# Altium PCB MCU103A.PcbDoc (part 2 of 6)
Units mm, origin at the board's own origin, x right, y up, seen from the top; angles counter-clockwise.
Board outline 58.42 x 139.7 mm, 4 copper layers (Top Signal, GND, PWR, Bottom Signal), stack 1.565 mm thick; 256 components, 210 nets, 1058 pads, 772 vias.
Unrouted connection lines stored in the file: 237.
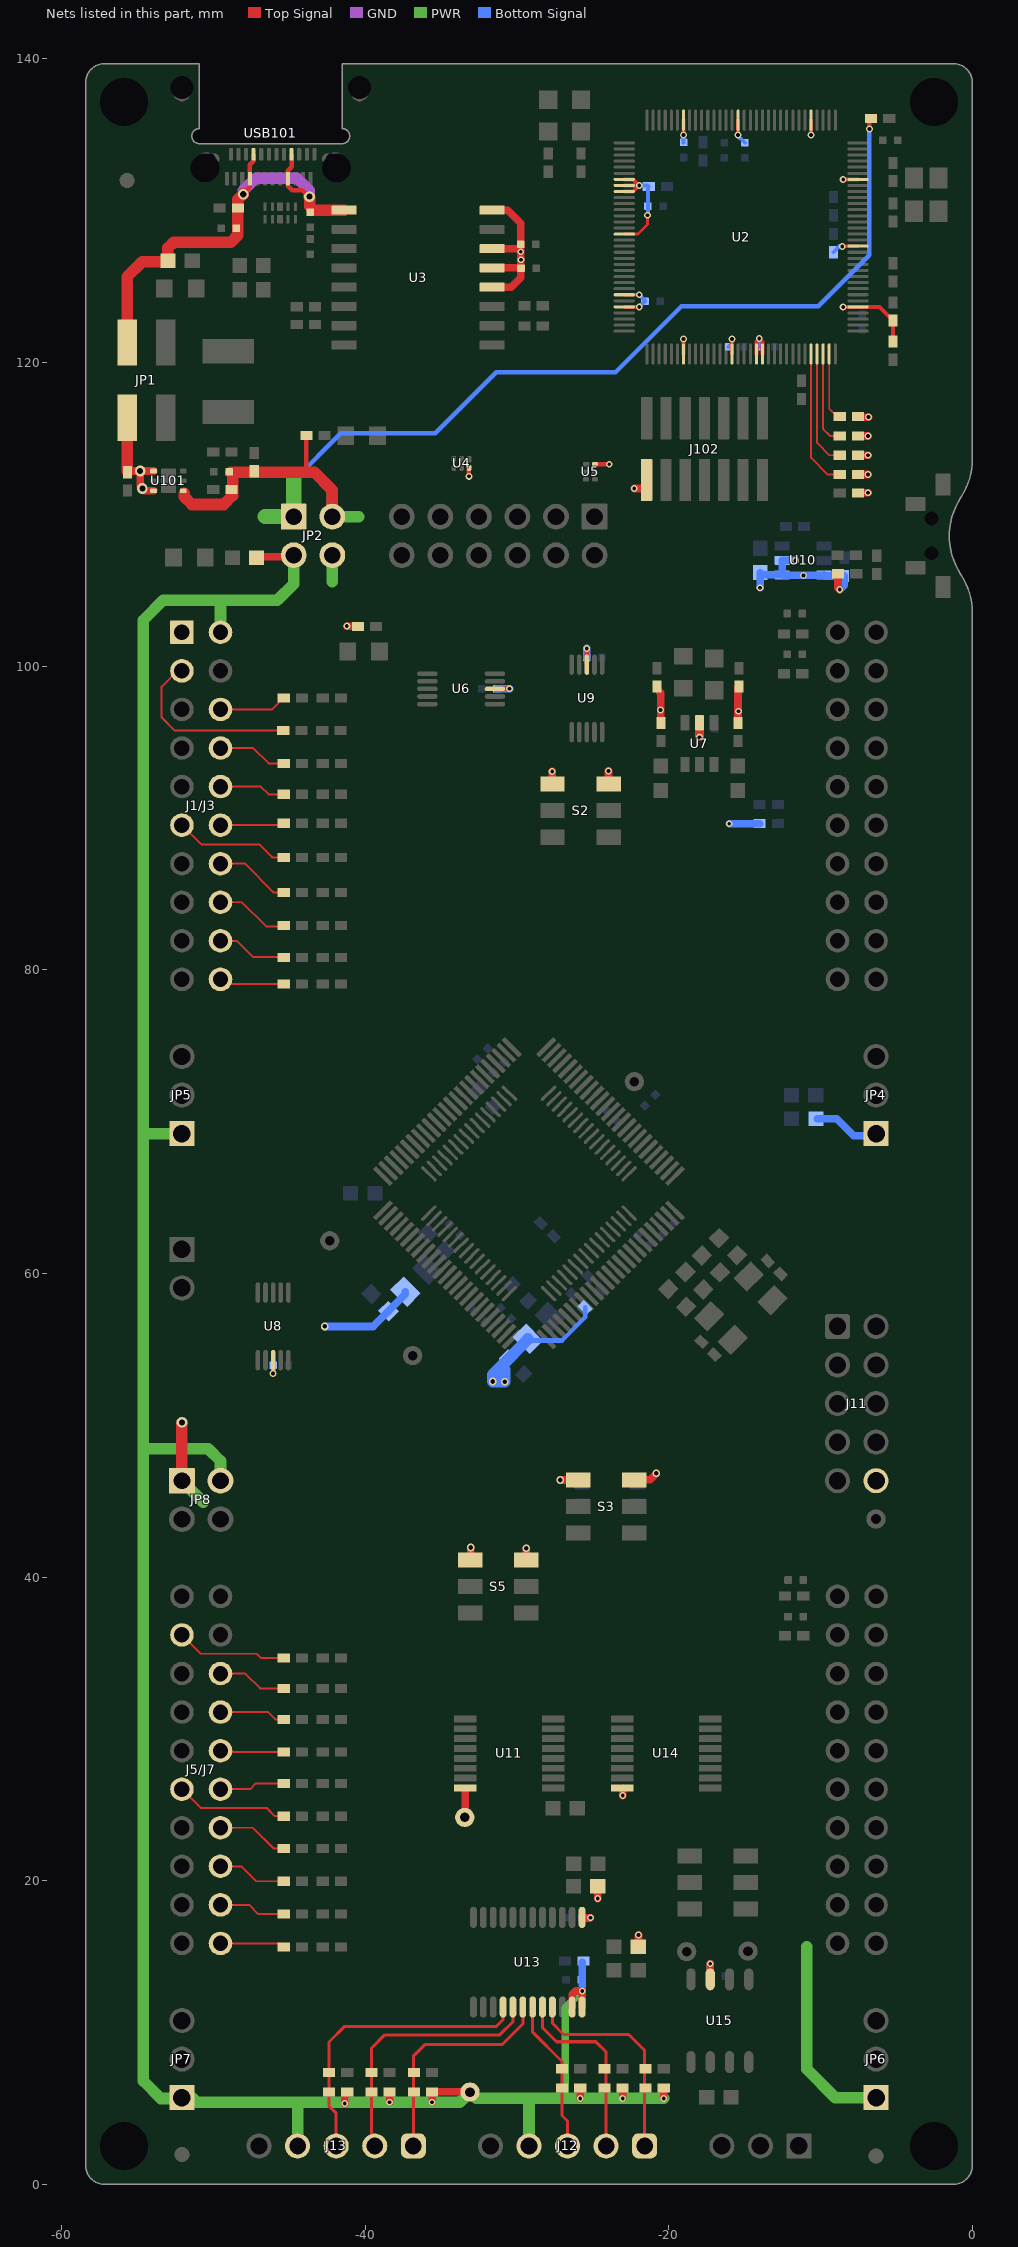
[diagram p4: the nets of this part, all layers, seen from the top]

## Part data
C1 C2 C10 C11 C12 C13 C14 C20 C21 C22 C23 C43 C44 C45 C46 C54 C55 C60 C64 C65 C66 C74 C81 C82 C83 C84 C105 C106: library part CMP-0090362-1, "0.1µF ±10% 10V Ceramic Capacitor X7R 0402 (1005 Metric)", Digikey Part Number=732-7513-1-ND, Manufacturer="Wurth Electronics", Mouser Part Number=710-885012205018, Operating Temperature Range="-55°C to +125°C", TempCo=15%, Temperature Characteristic=X7R, Tolerance_%=10%, ValueDisplayed=100000pF, AEC Qualified=No, Cap_F=100nF, ComponentLink1Description=Datasheet, ComponentLink1URL=https://www.we-online.com/catalog/datasheet/885012205018.pdf, datasheet=https://www.we-online.com/catalog/datasheet/885012205018.pdf, Datasheet Path=datasheets/Cap-885012205018.pdf, Digikey Description="CAP CER 0.1UF 10V X7R 0402", helpURL=https://upverter.com/upn/revision/1acbe355db19639d/, Lead Free=Yes, PackageReference=0402, Part Number=885012205018, PartNumber=885012205018, RoHS=TRUE, SizeZ_mm=0.55mm, Supplier 1=Digikey, Supplier 2=Mouser, Supplier Part Number 1=732-7513-1-ND, Supplier Part Number 2=710-885012205018, VDC_V=10V
C6 C17: library part CMP-0006629-2, "CAP, CERM, 0.1 uF, 10 V, +/- 10%, X7R, 0402", Cap_Case=0402, Manufacturer=MuRata, Supplier Part Number 1=GRM155R71A104KA01D-ND, TempCo=X7R, Tolerance_%=10%, Value1=Unknown, Value2=10V, ValueDisplayed=0.1uF, AEC Category=Q200, AEC Qualified=?, Cap_F=100nF, ComponentLink1Description="Datasheet link", ComponentLink1URL=http://search.murata.co.jp/Ceramy/PnsearchViewAction.do?HnOFG=ON&HnNFG=ON&SEL_CNT=50&sLang=en&sKey=GRM155R71A104KA01D&x=9&y=9&search=startwith, CompType=Capacitor, LatestRevisionDate=2017-03-09, MountType=SMT, PackageReference=0402, PartNumber=GRM155R71A104KA01D, Polarized=N, Published=2008-06-19, Publisher="Texas Instruments", RoHS=Y, SizeArea_mm2=0.5, SizeAreaWB_mm2=3, SizeX_mm=1, SizeY_mm=0.5, SizeZ_mm=0.6, Supplier 1=Digi-Key, Supplier 2=Newark, Supplier 3=Mouser, Supplier Part Number 2=14T3278, Supplier Part Number 3=81-GRM155R71A104KA1D, TaMax_C=125°C, TaMin_C=-55°C, Technology=Ceramic, U/M=EA, VDC_V=10V
C7 C8: library part CMP-0006658-2, "CAP, CERM, 0.01 uF, 25 V, +/- 10%, X7R, 0402", Cap_Case=0402, Manufacturer=MuRata, Supplier Part Number 1=490-1312-1-ND, TempCo=X7R, Tolerance_%=10%, Value1=Unknown, Value2=25V, ValueDisplayed=0.01uF, AEC Category=Q200, AEC Qualified=?, Cap_F=10nF, ComponentLink1Description="Datasheet link", ComponentLink1URL=http://search.murata.co.jp/Ceramy/PnsearchViewAction.do?HnOFG=ON&HnNFG=ON&SEL_CNT=50&sLang=en&sKey=GRM155R71E103KA01D&x=9&y=9&search=startwith, CompType=Capacitor, LatestRevisionDate=2017-03-09, MountType=SMT, PackageReference=0402, PartNumber=GRM155R71E103KA01D, Polarized=N, Published=2008-06-19, Publisher="Texas Instruments", RoHS=Y, SizeArea_mm2=0.5, SizeAreaWB_mm2=3, SizeX_mm=1, SizeY_mm=0.5, SizeZ_mm=0.6, Supplier 1=Digi-Key, Supplier 2=Mouser, Supplier 3=Farnell, Supplier Part Number 2=81-GRM36X103K25, Supplier Part Number 3=8819734, TaMax_C=125°C, TaMin_C=-55°C, Technology=Ceramic, U/M=EA, VDC_V=25V
C9 C18 C19: library part CMP-0092309-1, "Cap Ceramic 10uF 10V X5R 10% SMD 0603 85C Paper T/R", Digikey Part Number=311-1782-1-ND, Manufacturer=YAGEO, Mouser Part Number=603-CC603KRX5R6BB106, Octopart Part Number=1f0ad7d7c223c0cd, Operating Temperature Range="-55°C to +85°C", TempCo=15%, Temperature Characteristic=X5R, Tolerance_%=10%, ValueDisplayed=10uF, AEC Qualified=No, Cap_F=10µF, Category 4C11811B7D3097D6="Single Components", Category 85Ce48C4B2B95E09=Uncategorized, Category 7542B8484461Ae85="Passive Components", Category F8883582C9A8234F=Capacitors, ComponentLink1Description=Datasheet, ComponentLink1URL=https://www.yageo.com/upload/media/product/productsearch/datasheet/mlcc/UPY-GPHC_X5R_4V-to-50V_26.pdf, datasheet=https://www.yageo.com/upload/media/product/productsearch/datasheet/mlcc/UPY-GPHC_X5R_4V-to-50V_26.pdf, Datasheet Path=datasheets/Cap-CC0603KRX5R6BB106.pdf, Digikey Description="CAP CER 10UF 10V X5R 0603", helpURL=https://upverter.com/upn/revision/d12d152cf6e6e3e0/, Lead Free=Yes, Mouser Description="Multilayer Ceramic Capacitors MLCC - SMD/SMT 10M pF 10% 10 Volts", PackageReference=0603, Part Number=CC0603KRX5R6BB106, PartNumber=CC0603KRX5R6BB106, RoHS=TRUE, SizeZ_mm=1mm, Supplier 1=Digikey, Supplier 2=Mouser, Supplier Part Number 1=311-1782-1-ND, Supplier Part Number 2=603-CC603KRX5R6BB106, VDC_V=10V
C15 C16 C24: library part CMP-0007323-5, "CAP, CERM, 2.2 uF, 10 V, +/- 10%, X5R, 0603", Cap_Case=0603, Manufacturer=MuRata, Supplier Part Number 1=490-1545-1-ND, TempCo=X5R, Tolerance_%=10%, Value1=Unknown, Value2=10V, ValueDisplayed=2.2uF, AEC Category=Q200, AEC Qualified=?, Cap_F=2.2µF, ComponentLink1Description="Datasheet link", ComponentLink1URL=http://search.murata.co.jp/Ceramy/PnsearchViewAction.do?HnOFG=ON&HnNFG=ON&SEL_CNT=50&sLang=en&sKey=GRM188R61A225KE34D&x=9&y=9&search=startwith, CompType=Capacitor, LatestRevisionDate=2017-03-09, MountType=SMT, PackageReference=0603, PartNumber=GRM188R61A225KE34D, Polarized=N, Published=2008-06-19, Publisher="Texas Instruments", RoHS=Y, SizeArea_mm2=1.28, SizeAreaWB_mm2=4.68, SizeX_mm=1.6, SizeY_mm=0.8, SizeZ_mm=1, Supplier 1=Digi-Key, Supplier 2=Mouser, Supplier 3=Farnell, Supplier Part Number 2=81-GRM188R61A225KE34, Supplier Part Number 3=1828799, TaMax_C=85°C, TaMin_C=-55°C, Technology=Ceramic, U/M=EA, VDC_V=10V
C25 C26 C27 C28 C29 C30 C31 C32 C33 C34 C35 C36 C37 C38 C39 C40 C75 C76 C77 C78: library part CMP-0006218-2, "CAP, CERM, 220 pF, 50 V, +/- 5%, C0G/NP0, 0402", Cap_Case=0402, Manufacturer="Wurth Elektronik", Supplier Part Number 1=732-7477-1-ND, TempCo=C0G/NP0, Tolerance_%=5%, Value1=Unknown, Value2=50V, ValueDisplayed=220pF, AEC Category=Q200, AEC Grade=N/A, AEC Qualified=N, Cap_F=220pF, ComponentLink1Description="Datasheet link", ComponentLink1URL=http://katalog.we-online.de/pbs/datasheet/885012005063.pdf, CompType=Capacitor, LatestRevisionDate=2017-03-09, MountType=SMT, PackageReference=0402, PartNumber=885012005063, Polarized=N, Published=2008-06-19, Publisher="Texas Instruments", RoHS=Y, SizeArea_mm2=0.5, SizeAreaWB_mm2=3, SizeX_mm=1, SizeY_mm=0.5, SizeZ_mm=0.6, Supplier 1=Digi-Key, Supplier 2=Mouser, Supplier Part Number 2=710-885012005063, TaMax_C=125°C, TaMin_C=-55°C, Technology=Ceramic, U/M=EA, VDC_V=50V
C41 C42: library part CMP-0006239-2, "CAP, CERM, 12 pF, 25 V, +/- 5%, C0G/NP0, AEC-Q200 Grade 1, 0402", Cap_Case=0402, Manufacturer=Kemet, Supplier Part Number 1=399-6829-1-ND, TempCo=C0G/NP0, Tolerance_%=5%, Value1=Unknown, Value2=25V, ValueDisplayed=12pF, AEC Category=Q200, AEC Grade=1, AEC Qualified=Y, Cap_F=12pF, ComponentLink1Description="Datasheet link", ComponentLink1URL=http://www.kemet.com/Lists/ProductCatalog/Attachments/420/KEM_C1022_C0G_AUTO_SMD.pdf, CompType=Capacitor, LatestRevisionDate=2017-03-09, MountType=SMT, PackageReference=0402, PartNumber=C0402C120J3GACAUTO, Polarized=N, Published=2008-06-19, Publisher="Texas Instruments", RoHS=Y, SizeArea_mm2=0.5, SizeAreaWB_mm2=3, SizeX_mm=1, SizeY_mm=0.5, SizeZ_mm=0.6, Supplier 1=Digi-Key, Supplier 2=Newark, Supplier 3=Mouser, Supplier Part Number 2=86T2558, Supplier Part Number 3=80-C0402C120J3GAUTO, TaMax_C=125°C, TaMin_C=-55°C, Technology=Ceramic, U/M=EA, VDC_V=25V
C50 C51 C52 C53 C58 C102: library part CMP-0090363-1, "10000pF ±10% 25V Ceramic Capacitor X7R 0402 (1005 Metric)", Digikey Part Number=732-7545-1-ND, Manufacturer="Wurth Electronics", Mouser Part Number=710-885012205050, Operating Temperature Range="-55°C to +125°C", TempCo=15%, Temperature Characteristic=X7R, Tolerance_%=10%, ValueDisplayed=10000pF, AEC Qualified=No, Cap_F=10nF, ComponentLink1Description=Datasheet, ComponentLink1URL=https://www.we-online.com/catalog/datasheet/885012205050.pdf, datasheet=https://www.we-online.com/catalog/datasheet/885012205050.pdf, Datasheet Path=datasheets/Cap-885012205050.pdf, Digikey Description="CAP CER 10000PF 25V X7R 0402", helpURL=https://upverter.com/upn/revision/f9df62cb48b9b255/, Lead Free=Yes, PackageReference=0402, Part Number=885012205050, PartNumber=885012205050, RoHS=TRUE, SizeZ_mm=0.55mm, Supplier 1=Digikey, Supplier 2=Mouser, Supplier Part Number 1=732-7545-1-ND, Supplier Part Number 2=710-885012205050, VDC_V=25V
C56 C57 C59 C61 C100 C103: library part CMP-0064924-2, "CAP, CERM, 1 uF, 10 V,+/- 20%, X5R, 0402", Cap_Case=0402, Manufacturer="Wurth Elektronik", Supplier Part Number 1=732-7489-1-ND, TempCo=X5R, Tolerance_%=20%, Value1=Unknown, Value2=10V, ValueDisplayed=1uF, AEC Category=Q200, AEC Grade=N/A, AEC Qualified=N, Cap_F=1µF, ComponentLink1Description="Datasheet link", ComponentLink1URL=http://katalog.we-online.de/pbs/datasheet/885012105012.pdf, CompType=Capacitor, LatestRevisionDate=2017-06-05, MountType=SMT, PackageReference=0402, PartNumber=885012105012, Polarized=N, Published=2008-06-19, Publisher="Texas Instruments", RoHS=Y, SizeArea_mm2=0.5, SizeAreaWB_mm2=3, SizeX_mm=1, SizeY_mm=0.5, SizeZ_mm=0.6, Supplier 1=Digi-Key, Supplier 2=Newark, Supplier 3=Mouser, Supplier Part Number 2=75Y5997, Supplier Part Number 3=710-885012105012, TaMax_C=85°C, TaMin_C=-55°C, Technology=Ceramic, U/M=EA, VDC_V=10V
C62 C63: library part CMP-0006415-2, "CAP, CERM, 12 pF, 50 V, +/- 5%, C0G/NP0, 0402", Cap_Case=0402, Manufacturer=MuRata, Supplier Part Number 1=14T3292, TempCo=C0G/NP0, Tolerance_%=5%, Value1=Unknown, Value2=50V, ValueDisplayed=12pF, AEC Category=Q200, AEC Qualified=?, Cap_F=12pF, ComponentLink1Description="Datasheet link", ComponentLink1URL=http://search.murata.co.jp/Ceramy/PnsearchViewAction.do?HnOFG=ON&HnNFG=ON&SEL_CNT=50&sLang=en&sKey=GRM1555C1H120JA01D&x=9&y=9&search=startwith, CompType=Capacitor, LatestRevisionDate=2017-03-09, MountType=SMT, PackageReference=0402, PartNumber=GRM1555C1H120JA01D, Polarized=N, Published=2008-06-19, Publisher="Texas Instruments", RoHS=Y, SizeArea_mm2=0.5, SizeAreaWB_mm2=3, SizeX_mm=1, SizeY_mm=0.5, SizeZ_mm=0.6, Supplier 1=Newark, Supplier 2=Mouser, Supplier 3=Farnell, Supplier Part Number 2=81-GRM1555C1H120JA1D, Supplier Part Number 3=1828875, TaMax_C=125°C, TaMin_C=-55°C, Technology=Ceramic, U/M=EA, VDC_V=50V
C67 C68 C69 C70 C71 C72 C73: library part CMP-0006231-2, "CAP, CERM, 1000 pF, 50 V, +/- 10%, X7R, 0402", Cap_Case=0402, Manufacturer="Wurth Elektronik", Supplier Part Number 1=732-7556-1-ND, TempCo=X7R, Tolerance_%=10%, Value1=Unknown, Value2=50V, ValueDisplayed=1000pF, AEC Category=Q200, AEC Grade=N/A, AEC Qualified=N, Cap_F=1nF, ComponentLink1Description="Datasheet link", ComponentLink1URL=http://katalog.we-online.de/pbs/datasheet/885012205061.pdf, CompType=Capacitor, LatestRevisionDate=2017-03-09, MountType=SMT, PackageReference=0402, PartNumber=885012205061, Polarized=N, Published=2008-06-19, Publisher="Texas Instruments", RoHS=Y, SizeArea_mm2=0.5, SizeAreaWB_mm2=3, SizeX_mm=1, SizeY_mm=0.5, SizeZ_mm=0.6, Supplier 1=Digi-Key, Supplier 2=Mouser, Supplier Part Number 2=710-885012205061, TaMax_C=125°C, TaMin_C=-55°C, Technology=Ceramic, U/M=EA, VDC_V=50V
C101: library part CMP-0092424-1, "Cap Cer 3300pF 50V X7R 0402", Digikey Part Number=732-7559-1-ND, Manufacturer="Wurth Electronics", Mouser Part Number=710-885012205064, Operating Temperature Range="-55°C to +125°C", TempCo=15%, Temperature Characteristic=X7R, Tolerance_%=10%, ValueDisplayed=3.3nF, AEC Qualified=No, Cap_F=3.3nF, ComponentLink1Description=Datasheet, ComponentLink1URL=https://www.we-online.com/catalog/datasheet/885012205064.pdf, datasheet=https://www.we-online.com/catalog/datasheet/885012205064.pdf, Datasheet Path=datasheets/Cap-885012205064.pdf, Digikey Description="CAP CER 3300PF 50V X7R 0402", helpURL=https://upverter.com/upn/revision/78c7421d1fb19545/, Lead Free=Yes, PackageReference=0402, Part Number=885012205064, PartNumber=885012205064, RoHS=TRUE, SizeZ_mm=0.55mm, Supplier 1=Digikey, Supplier 2=Mouser, Supplier Part Number 1=732-7559-1-ND, Supplier Part Number 2=710-885012205064, VDC_V=50V
C104: library part CMP-0009297-2, "CAP, CERM, 0.01 uF, 1500 V, +/- 10%, X7R, 1812", Cap_Case=1812, Manufacturer=AVX, Supplier Part Number 1=478-4735-1-ND, TempCo=X7R, Tolerance_%=10%, Value1="0.05 ohm", Value2=1500V, ValueDisplayed=0.01uF, AEC Category=Q200, AEC Grade=N/A, AEC Qualified=N, Cap_F=10nF, ComponentLink1Description="Datasheet link", ComponentLink1URL=http://datasheets.avx.com/AVX-HV_MLCC.pdf, CompType=Capacitor, ESR_ohm=0.05, LatestRevisionDate=2017-03-09, MountType=SMT, PackageReference=1812, PartNumber=1812SC103KAT1A, Polarized=N, Published=2008-06-19, Publisher="Texas Instruments", RoHS=Y, SizeArea_mm2=14.4, SizeAreaWB_mm2=23.1, SizeX_mm=4.5, SizeY_mm=3.2, SizeZ_mm=1.35, Supplier 1=Digi-Key, Supplier 2=Newark, Supplier 3=Mouser, Supplier Part Number 2=96M1562, Supplier Part Number 3=581-1812SC103KAT1A, TaMax_C=125°C, TaMin_C=-55°C, Technology=Ceramic, U/M=EA, VDC_V=1.5kV
"CE Logo1": library part CMP-0074844-1, LatestRevisionDate=2017-07-06, Lib Reference="CE Mark", PartNumber="CE Mark", Published=2009-03-03, Publisher="Texas Instruments", SymbolCreator=a0412235
FID1 FID2 FID3 FID4 FID5 FID6: library part CMP-0077181-1, "Fiducial mark.  There is nothing to buy or mount.", Manufacturer=N/A, ClassName=FiducialMark, CompType=Fiducial, MountType=N/A, PackageReference=N/A, PartNumber=N/A
J1/J3: library part CMP-0003837-4, "Receptacle, 2.54mm, 10x2, Tin, TH", Alternate Manufacturer="Major League Electronics", Alternate PartNumber=CRD-081413-A-G, Manufacturer=Samtec, Supplier Part Number 1=SAM1204-10-ND, ComponentLink1Description="Datasheet Link", ComponentLink1URL=https://www.samtec.com/ftppub/cpdf/SSQ-1XX-XX-XXX-X-XX-XXX-XX-X-MKT.pdf, CompType=Receptacle, Green_EU RoHS=Passed, Green_EU RoHS-2=Passed, Green_Lifecycle=Active, Green_REACh=Incomplete, MountType=TH, Note="Booster Pack 40 pin J1 and J3", PackageReference="10x2 Receptacle", PartNumber=SSQ-110-03-T-D, RoHS=Y, Supplier 1=Digi-Key, Supplier 2=Newark, Supplier Part Number 2=11P8392
J4/J2: library part CMP-0078266-4, "Receptacle, 2.54mm, 10x2, Tin, TH", Alternate Manufacturer="Major League Electronics", Alternate PartNumber=CRD-081413-A-G, Manufacturer=Samtec, Supplier Part Number 1=SAM1204-10-ND, ComponentLink1Description="Datasheet Link", ComponentLink1URL=https://www.samtec.com/ftppub/cpdf/SSQ-1XX-XX-XXX-X-XX-XXX-XX-X-MKT.pdf, CompType=Receptacle, Green_EU RoHS=Passed, Green_EU RoHS-2=Passed, Green_Lifecycle=Active, Green_REACh=Incomplete, MountType=TH, Note="Booster Pack 40 pin J2 and J4", PackageReference="10x2 Receptacle", PartNumber=SSQ-110-03-T-D, RoHS=Y, Supplier 1=Digi-Key, Supplier 2=Newark, Supplier Part Number 2=11P8392
J5/J7: library part CMP-0081070-3, "Receptacle, 2.54mm, 10x2, Tin, TH", Alternate Manufacturer="Major League Electronics", Alternate PartNumber=CRD-081413-A-G, Manufacturer=Samtec, Supplier Part Number 1=SAM1204-10-ND, ComponentLink1Description="Datasheet Link", ComponentLink1URL=https://www.samtec.com/ftppub/cpdf/SSQ-1XX-XX-XXX-X-XX-XXX-XX-X-MKT.pdf, CompType=Receptacle, Green_EU RoHS=Passed, Green_EU RoHS-2=Passed, Green_Lifecycle=Active, Green_REACh=Incomplete, MountType=TH, Note="Booster Pack 40 pin J5 and J7", PackageReference="10x2 Receptacle", PartNumber=SSQ-110-03-T-D, RoHS=Y, Supplier 1=Digi-Key
J8/J6: library part CMP-0081071-3, "Receptacle, 2.54mm, 10x2, Tin, TH", Alternate Manufacturer="Major League Electronics", Alternate PartNumber=CRD-081413-A-G, Manufacturer=Samtec, Supplier Part Number 1=SAM1204-10-ND, ComponentLink1Description="Datasheet Link", ComponentLink1URL=https://www.samtec.com/ftppub/cpdf/SSQ-1XX-XX-XXX-X-XX-XXX-XX-X-MKT.pdf, CompType=Receptacle, Green_EU RoHS=Passed, Green_EU RoHS-2=Passed, Green_Lifecycle=Active, Green_REACh=Incomplete, MountType=TH, Note="Booster Pack 40 pin J6 and J8", PackageReference="10x2 Receptacle", PartNumber=SSQ-110-03-T-D, RoHS=Y, Supplier 1=Digi-Key
J11: library part CMP-0054806-3, "Header, 2.54 mm, 5x2, Gold, TH", Current_A=3A, Manufacturer="Wurth Elektronik", Supplier Part Number 1=732-2672-ND, Voltage_V=250V, Cert_UL=Y, ClassName=Header, ComponentLink1Description="Datasheet URL", ComponentLink1URL=http://katalog.we-online.de/em/datasheet/6130xx21121.pdf, CompType=Header, ContactFinish=Gold, Gender=Male, Green_EU RoHS=Passed, Green_EU RoHS-2=Incomplete, Green_Lifecycle=Active, Green_REACh=Passed, MountType=TH, Orientation=Vertical, PackageReference="Header, 2.54mm, 5x2, TH", PartNumber=61301021121, PinCount=10, Pitch_mm=2.54, RoHS=Y, Row_Count=2, RowSpacing_mm=2.54, Shrouded=N, Supplier 1=Digi-Key, Supplier 2=Newark, Supplier 3=Mouser, Supplier Part Number 2=16T0631, Supplier Part Number 3=710-61301021121
J12 J13: library part CMP-0084909-1, "Header, 2.54mm, 5x1, Gold, TH", Color=Black, Current_A=3A, Manufacturer="Wurth Elektronik", Voltage_V=250V, ClassName=Header, ComponentLink1Description="Datasheet URL", ComponentLink1URL=https://katalog.we-online.de/em/datasheet/6130xx11121.pdf, CompType=Header, ContactFinish=Gold, Gender=Male, MountType=TH, Orientation=Vertical, PackageReference="Header, 2.54mm, 5x1, TH", PartNumber=61300511121, PinCount=5, Pitch_mm=2.54, RoHS=Y, Row_Count=1, Shrouded=N
J14 JP4 JP5 JP6 JP7: library part CMP-0054796-1, "Header, 2.54 mm, 3x1, Gold, TH", Manufacturer="Wurth Elektronik", Supplier Part Number 1=732-5316-ND, ClassName=Header, CNHeader=TRUE, ComponentLink1Description="Datasheet URL", ComponentLink1URL=http://katalog.we-online.de/em/datasheet/6130xx11121.pdf, CompType=Header, CT=FALSE, Green_EU RoHS=Passed, Green_EU RoHS-2=Incomplete, Green_Lifecycle=Active, Green_REACh=Passed, LatestRevisionDate=26/05/2017, MountType=TH, PackageReference="Header, 2.54mm, 3x1, TH", PartNumber=61300311121, Publisher="Texas Instruments", RoHS=Y, Supplier 1=Digi-Key, Supplier 2=Newark, Supplier 3=Farnell, Supplier Part Number 2=20X0950, Supplier Part Number 3=356154
J15: library part CMP-0054794-1, "Header, 2.54 mm, 2x1, Gold, TH", Manufacturer="Wurth Elektronik", Supplier Part Number 1=732-5315-ND, ClassName=Header, CNHeader=TRUE, ComponentLink1Description="Datasheet URL", ComponentLink1URL=http://katalog.we-online.de/em/datasheet/6130xx11121.pdf, CompType=Header, CT=FALSE, Green_EU RoHS=Passed, Green_EU RoHS-2=Incomplete, Green_Lifecycle=Active, Green_REACh=Passed, LatestRevisionDate=26/05/2017, MountType=TH, PackageReference="Header, 2.54mm, 2x1, TH", PartNumber=61300211121, Publisher="Texas Instruments", RoHS=Y, Supplier 1=Digi-Key, Supplier 2=Newark, Supplier 3=Mouser, Supplier Part Number 2=20X0948, Supplier Part Number 3=710-61300211121
J101: library part CMP-0092423-1, "THT Vertical Pin Header WR-PHD, Pitch 2.54 mm, Dual Row, 12 pins", Current_A=3A, Digikey Part Number=732-5297-ND, Manufacturer="Wurth Electronics", Mouser Part Number=710-61301221121, Operating Temperature Range="-40°C to +105°C", Voltage_V=250V, AEC Qualified=No, ComponentLink1Description=Datasheet, ComponentLink1URL=https://www.we-online.com/catalog/datasheet/61301221121.pdf, Conn Gender=Male, Conn Orientation=Straight, ContactFinish=Gold, datasheet=https://www.we-online.com/catalog/datasheet/61301221121.pdf, Datasheet Path=datasheets/Conn-61301221121.pdf, Digikey Description="CONN HEADER VERT 12POS 2.54MM", DUT-Pitch_mm=2.54mm, helpURL=https://upverter.com/upn/revision/392edd98517a0c19/, Is Female=no, Lead Free=Yes, PackageReference=HDR12, Part Number=61301221121, PartNumber=61301221121, PinCount=12, RoHS=TRUE, Row_Count=2, SizeZ_mm=8.89mm, Supplier 1=Digikey, Supplier 2=Mouser, Supplier Part Number 1=732-5297-ND, Supplier Part Number 2=710-61301221121
J102: library part CMP-0092335-1, "Connector, Header, Dual Row, 14 pin, .05\" pitch/row spacing, Male, Shrouded, Keyed, IDC, SMT", Current_A=3.4A, Digikey Part Number=612-FTSH-107-01-F-DV-K-ND, Manufacturer=Samtec, Mouser Part Number=200-FTSH10701FDVK, Octopart Part Number=b9dd70752dfc661a, Operating Temperature Range="-55°C to +125°C", AEC Qualified=No, Category 75Fab8F04590Ae3D="Connectors and Adapters", Category 0836C53C3D42D3F1=Connectors, Category A3C16Ecb93907806=Uncategorized, Category Bda670Ac885E6661=Uncategorized, Category E7012A0Bd22E3Cc6="Headers & Receptacles", ComponentLink1Description=Datasheet, ComponentLink1URL=https://suddendocs.samtec.com/catalog_english/ftsh_smt.pdf, Conn Gender=Male, Conn Orientation=Vertical, ContactFinish=Gold,Nickel, datasheet=https://suddendocs.samtec.com/catalog_english/ftsh_smt.pdf, Datasheet Path=datasheets/Conn-FTSH-107-01-F-DV-K.pdf, Digikey Description="CONN HEADER SMD 14POS 1.27MM", DUT-Pitch_mm=1.27mm, helpURL=https://upverter.com/upn/revision/57d08244f4d86490/, Is Female=no, Lead Free=Yes, Mouser Description="Conn Unshrouded Header HDR 14 POS 1.27mm Solder ST SMD Tube", PackageReference=HDR14, Part Number=FTSH-107-01-F-DV-K, PartNumber=FTSH-107-01-F-DV-K, PinCount=14, RoHS=TRUE, Row_Count=2, SizeZ_mm=6.38mm, Standoff Height=0.15mm, Supplier 1=Digikey, Supplier 2=Mouser, Supplier Part Number 1=612-FTSH-107-01-F-DV-K-ND, Supplier Part Number 2=200-FTSH10701FDVK
JP1: library part CMP-0055559-1, "Header, 2.54mm, 2x2, Gold, SMT", Color=Black, Manufacturer=Samtec, Supplier Part Number 1=TSM-102-01-L-DV-ND, Voltage_V=475V, Cert_CSA=Y, Cert_UL=Y, ClassName=Header, CNHeader=TRUE, ComponentLink1Description="Datasheet URL", ComponentLink1URL=http://suddendocs.samtec.com/catalog_english/tsm.pdf, CompType=Header, ContactFinish=Gold, CT=FALSE, Gender=Male, LatestRevisionDate=26/05/2017, MountType=SMT, Orientation=Vertical, PackageReference="Header, 2.54mm, 2x2, SMT", PartNumber=TSM-102-01-L-DV, PinCount=4, Pitch_mm=2.54, Publisher="Texas Instruments", RoHS=Y, Row_Count=2, Shrouded=N, Supplier 1=Digi-Key, Supplier 2=Newark, Supplier 3=Farnell, Supplier Part Number 2=27C2242, Supplier Part Number 3=1803290
JP2 JP8: library part CMP-0092422-1, "THT Vertical Pin Header WR-PHD, Pitch 2.54 mm, Dual Row, 4 pins", Current_A=3A, Digikey Part Number=732-5294-ND, Manufacturer="Wurth Electronics", Mouser Part Number=710-61300421121, Operating Temperature Range="-40°C to +105°C", Voltage_V=250V, AEC Qualified=No, ComponentLink1Description=Datasheet, ComponentLink1URL=https://www.we-online.com/catalog/datasheet/61300421121.pdf, Conn Gender=Male, Conn Orientation=Straight, ContactFinish=Gold, datasheet=https://www.we-online.com/catalog/datasheet/61300421121.pdf, Datasheet Path=datasheets/Conn-61300421121.pdf, Digikey Description="CONN HEADER VERT 4POS 2.54MM", DUT-Pitch_mm=2.54mm, helpURL=https://upverter.com/upn/revision/de171c811246619e/, Is Female=no, Lead Free=Yes, PackageReference=HDR4, Part Number=61300421121, PartNumber=61300421121, PinCount=4, RoHS=TRUE, Row_Count=2, SizeZ_mm=8.89mm, Supplier 1=Digikey, Supplier 2=Mouser, Supplier Part Number 1=732-5294-ND, Supplier Part Number 2=710-61300421121
L2: library part CMP-0003093-1, "Ferrite Bead, 60 ohm @ 100 MHz, 3 A, 0805", Manufacturer="Wurth Elektronik", Supplier Part Number 1=732-1612-1-ND, Value1="0.025 ohm", Value2=3A, ValueDisplayed="60 ohm", ComponentLink1Description="Datasheet link", ComponentLink1URL=http://katalog.we-online.de/pbs/datasheet/742792063.pdf, CompType="Ferrite Bead", DCR_ohm=0.025, Imax_A=3A, LatestRevisionDate=2017-03-09, MountType=SMT, PackageReference=0805, PartNumber=742792063, Published=2014-04-30, Publisher="Texas Instruments", RoHS=Y, SizeArea_mm2=2.5, SizeAreaWB_mm2=6.75, SizeX_mm=2, SizeY_mm=1.25, SizeZ_mm=1.45, Supplier 1=Digi-Key, Supplier 2=Mouser, Supplier Part Number 2=710-742792063, Ztyp@1GHz_Ohm=95.384, ZTyp@100MHz_Ohm=60
L3: library part CMP-0003073-1, "Ferrite Bead, 220 ohm @ 100 MHz, 2 A, 0805", Manufacturer="Wurth Elektronik", Supplier Part Number 1=732-1614-1-ND, Value1="0.05 ohm", Value2=2A, ValueDisplayed="220 ohm", ComponentLink1Description="Datasheet link", ComponentLink1URL=http://katalog.we-online.de/pbs/datasheet/742792022.pdf, CompType="Ferrite Bead", DCR_ohm=0.05, Imax_A=2A, LatestRevisionDate=2017-03-09, MountType=SMT, PackageReference=0805, PartNumber=742792022, Published=2014-04-30, Publisher="Texas Instruments", RoHS=Y, SizeArea_mm2=2.5, SizeAreaWB_mm2=6.75, SizeX_mm=2, SizeY_mm=1.25, SizeZ_mm=1.45, Supplier 1=Digi-Key, Supplier 2=Mouser, Supplier Part Number 2=710-742792022, Ztyp@1GHz_Ohm=190.289, ZTyp@100MHz_Ohm=220
LED0 LED1 LED4 LED6 LED7: library part CMP-0002951-3, "LED, Red, SMD", Color=Red, Manufacturer="Wurth Elektronik", Power_TotalModule=72mW, Value1=0.072W, Value2=1.9V, Angle=140, ComponentLink1Description="Datasheet link", ComponentLink1URL=http://katalog.we-online.de/led/datasheet/150080SS75000.pdf, CompType=LED, Io_A=30mA, Ir_A=25µA, MountType=SMT, PackageReference=LED_0805, PartNumber=150080SS75000, RoHS=Y, TJmax_C=85°C, Type=AlInGaP, Vf_V=1.9V, Vr_V=5V
LED2 LED3: library part CMP-0002889-2, "LED, Blue, SMD", Color=Blue, Manufacturer=Lite-On, Value1=W, Value2=3.3V, ComponentLink1Description="Datasheet link", ComponentLink1URL=http://optoelectronics.liteon.com/upload/download/DS-22-99-0226/S_110_LTST-C170TBKT.pdf, CompType=LED, Io_A=20mA, MountType=SMT, PackageReference=LED_0805, PartNumber=LTST-C170TBKT, RoHS=Y, Type=AlInGaP, Vf_V=3.3V
LED5: library part CMP-0002830-3, "LED, Green, SMD", Color=green, Manufacturer=Lite-On, Value1=W, Value2=2.1V, ComponentLink1Description="Datasheet link", ComponentLink1URL=https://sps06.itg.ti.com/sites/KMS/crossdivteams/altium/docs/ComponentDatasheets/LTST-C171GKT.pdf, CompType=LED, Io_A=20A, MountType=SMT, PackageReference="0805 LED", PartNumber=LTST-C171GKT, RoHS=Y, SizeArea_mm2=2.5, SizeAreaWB_mm2=6.75, SizeX_mm=2, SizeY_mm=1.25, SizeZ_mm=1.2, Type=AlInGaP, Vf_V=2.1V
Logo1 Logo5: library part CMP-0074838-1, "Texas Instrument Corporate Signature", ClassName=Logo, LatestRevisionDate=2017-07-06, Lib Reference=TI_Logo, PartNumber="Texas Instruments", Published=2009-03-03, Publisher="Texas Instruments", SymbolCreator=a0412235, SymbolVersion=2011-08-22
Logo3: library part CMP-0074847-1, "FCC_disclaimer", LatestRevisionDate=2017-07-06, Lib Reference=FCC_disclaimer, PartNumber="FCC disclaimer", Published=2009-03-03, Publisher="Texas Instruments"
Logo4: library part CMP-0074769-1, Lib Reference="WEEE logo", PartNumber="WEEE logo"
M1 M2 M3 M4 M5 M6 M7 M8 M9 M10 M11 M12: library part CMP-0003761-2, "Shunt, 2.54mm, Gold, Black", Manufacturer="Wurth Elektronik", Supplier Part Number 1=732-2678-ND, ClassName=Shunt, ComponentLink1Description="Datasheet Link", ComponentLink1URL=http://katalog.we-online.de/em/datasheet/60900213421.pdf, CompType=Shunt, MountType=N/A, PackageReference="Shunt, 2.54mm, Black", PartNumber=60900213421, RoHS=Y, Supplier 1=Digi-Key, Supplier 2=Newark, Supplier 3=Mouser, Supplier Part Number 2=16T0609, Supplier Part Number 3=710-60900213421
MH1 MH2 MH3 MH4: library part CMP-0078424-2, "PCB Mounting Hole, No Pad", Manufacturer=Any, PartNumber=N/A, CompType="Mounting Hole", Key="Mounting Hole (non-standard) No Pad", MountType=N/A, PackageReference="Mounting Hole"
R1 R2 R8 R9 R12 R13 R14 R15 R16 R17 R18 R19 R20 R21 R22 R23 R24 R25 R26 R27 R44 R45 R49 R50 R84 R85 R86 R87 R103 R104: library part CMP-0027004-2, "RES, 0, 5%, 0.063 W, 0402", Manufacturer="Yageo America", Power_W=63mW, Supplier Part Number 1=311-0.0JRCT-ND, TempCo="200 ppm/C", Tolerance_%=5%, Value2=0.063W, Value_Code=0000, ValueDisplayed=0, AEC Category=Q200, AEC Qualified=?, ComponentLink1Description="Datasheet link", ComponentLink1URL=http://www.yageo.com/pdf/Pu-RC0402_51_PbFree_L_2.pdf, CompType=Resistor, EIA_Code=E24, LatestRevisionDate=2017-03-09, MountType=SMT, PackageReference=0402, PartNumber=RC0402JR-070RL, Published=2008-06-26, Publisher="Texas Instruments", Res_ohm=0, RoHS=Y, SizeArea_mm2=0.5, SizeX_mm=1, SizeY_mm=0.5, SizeZ_mm=0.6, Supplier 1=Digi-Key, Supplier 2=Mouser, Supplier 3=Farnell, Supplier Part Number 2=603-RC0402JR-070RL, Supplier Part Number 3=9232516, Technology="Thick Film", U/M=EA, Value1=5%, VDC_V=50V
R3 R28 R29 R105: library part CMP-0026962-3, "RES, 680, 5%, 0.063 W, AEC-Q200 Grade 0, 0402", Manufacturer=Vishay-Dale, Power_W=63mW, Supplier Part Number 1=541-680JCT-ND, TempCo="200 ppm/C", Tolerance_%=5%, Value2=0.063W, Value_Code=680R, ValueDisplayed=680, AEC Category=Q200, AEC Grade=0, AEC Qualified=Y, ComponentLink1Description="Datasheet link", ComponentLink1URL=http://www.vishay.com/docs/20035/dcrcwe3.pdf, CompType=Resistor, EIA_Code=E24, MountType=SMT, PackageReference=0402, PartNumber=CRCW0402680RJNED, Res_ohm=680, RoHS=E, SizeArea_mm2=0.5, SizeX_mm=1, SizeY_mm=0.5, SizeZ_mm=0.6, Supplier 1=Digi-Key, Supplier 2=Newark, Supplier 3=Mouser, Supplier Part Number 2=59M6744, Supplier Part Number 3=71-CRCW0402J-680-E3, Technology="Thick Film", Value1=5%, VDC_V=50V
R4 R10 R11: library part CMP-0026890-5, "RES, 2.2 k, 5%, 0.063 W, AEC-Q200 Grade 0, 0402", Manufacturer=Vishay-Dale, Power_W=63mW, Supplier Part Number 1=541-2.2KJCT-ND, TempCo="200 ppm/C", Tolerance_%=5%, Value2=0.063W, Value_Code=2k20, ValueDisplayed=2.2k, AEC Category=Q200, AEC Grade=0, AEC Qualified=Y, ComponentLink1Description="Datasheet link", ComponentLink1URL=http://www.vishay.com/docs/20035/dcrcwe3.pdf, CompType=Resistor, EIA_Code=E24, MountType=SMT, PackageReference=0402, PartNumber=CRCW04022K20JNED, Res_ohm=2.2k, RoHS=E, SizeArea_mm2=0.5, SizeX_mm=1, SizeY_mm=0.5, SizeZ_mm=0.6, Supplier 1=Digi-Key, Supplier 2=Newark, Supplier 3=Mouser, Supplier Part Number 2=59M6710, Supplier Part Number 3=71-CRCW0402J-2.2K-E3, Technology="Thick Film", Value1=5%, VDC_V=50V
R5: library part CMP-0026822-3, "RES, 0, 5%, 0.063 W, AEC-Q200 Grade 0, 0402", Manufacturer=Vishay-Dale, Power_W=63mW, Supplier Part Number 1=541-0.0JCT-ND, TempCo="200 ppm/C", Tolerance_%=5%, Value2=0.063W, Value_Code=0000, ValueDisplayed=0, AEC Category=Q200, AEC Grade=0, AEC Qualified=Y, ComponentLink1Description="Datasheet link", ComponentLink1URL=http://www.vishay.com/docs/20035/dcrcwe3.pdf, CompType=Resistor, EIA_Code=E24, MountType=SMT, PackageReference=0402, PartNumber=CRCW04020000Z0ED, Res_ohm=0, RoHS=E, SizeArea_mm2=0.5, SizeX_mm=1, SizeY_mm=0.5, SizeZ_mm=0.6, Supplier 1=Digi-Key, Supplier 2=Newark, Supplier 3=Mouser, Supplier Part Number 2=52K6543, Supplier Part Number 3=71-CRCW0402-0-E3, Technology="Thick Film", Value1=5%, VDC_V=50V
R6 R48: library part CMP-0025769-4, "RES, 2.2 k, 5%, 0.1 W, AEC-Q200 Grade 0, 0603", Manufacturer=Vishay-Dale, Power_W=100mW, Supplier Part Number 1=541-2.2KGCT-ND, TempCo="200 ppm/C", Tolerance_%=5%, Value2=0.1W, Value_Code=2k20, ValueDisplayed=2.2k, AEC Category=Q200, AEC Grade=0, AEC Qualified=Y, ComponentLink1Description="Datasheet link", ComponentLink1URL=http://www.vishay.com/docs/20035/dcrcwe3.pdf, CompType=Resistor, EIA_Code=E24, MountType=SMT, PackageReference=0603, PartNumber=CRCW06032K20JNEA, Res_ohm=2.2k, RoHS=E, SizeArea_mm2=1.28, SizeX_mm=1.6, SizeY_mm=0.8, SizeZ_mm=1, Supplier 1=Digi-Key, Supplier 2=Newark, Supplier 3=Farnell, Supplier Part Number 2=59M6776, Supplier Part Number 3=1652868, Technology="Thick Film", Value1=5%, VDC_V=75V
R7 R43: library part CMP-0025921-5, "RES, 3.0 k, 5%, 0.1 W, 0603", Manufacturer=Yageo, Power_W=100mW, Supplier Part Number 1=311-3.0KGRCT-ND, TempCo="100 ppm/C", Tolerance_%=5%, Value2=0.1W, Value_Code=3k00, ValueDisplayed=3.0k, AEC Category=Q200, AEC Grade=N/A, AEC Qualified=N, ComponentLink1Description="Datasheet link", ComponentLink1URL=http://www.yageo.com/pdf/Pu-RC0603_51_PbFree_L_2.pdf, CompType=Resistor, EIA_Code=E24, MountType=SMT, PackageReference=0603, PartNumber=RC0603JR-073KL, Res_ohm=3k, RoHS=Y, SizeArea_mm2=1.28, SizeAreaWB_mm2=4.68, SizeX_mm=1.6, SizeY_mm=0.8, SizeZ_mm=1, Supplier 1=Digi-Key, Supplier 2=Mouser, Supplier 3=Farnell, Supplier Part Number 2=603-RC0603JR-073KL, Supplier Part Number 3=1799415, Technology="Thick Film", Value1=5%, VDC_V=75V
R30 R31: library part CMP-0026826-2, "RES, 10 M, 5%, 0.063 W, AEC-Q200 Grade 0, 0402", Manufacturer=Vishay-Dale, Power_W=63mW, Supplier Part Number 1=541-10MJCT-ND, TempCo="200 ppm/C", Tolerance_%=5%, Value2=0.063W, Value_Code=10M0, ValueDisplayed=10M, AEC Category=Q200, AEC Grade=0, AEC Qualified=Y, ComponentLink1Description="Datasheet link", ComponentLink1URL=http://www.vishay.com/docs/20035/dcrcwe3.pdf, CompType=Resistor, EIA_Code=E24, MountType=SMT, PackageReference=0402, PartNumber=CRCW040210M0JNED, Res_ohm=10M, RoHS=E, SizeArea_mm2=0.5, SizeX_mm=1, SizeY_mm=0.5, SizeZ_mm=0.6, Supplier 1=Digi-Key, Supplier 2=Newark, Supplier 3=Mouser, Supplier Part Number 2=59M6697, Supplier Part Number 3=71-CRCW0402J-10M-E3, Technology="Thick Film", Value1=5%, VDC_V=50V
R32 R33 R34 R35 R36 R37 R41 R47 R52 R53 R82 R83: library part CMP-0025697-4, "RES, 0, 5%, 0.1 W, AEC-Q200 Grade 0, 0603", Manufacturer=Vishay-Dale, Power_W=100mW, Supplier Part Number 1=541-0.0GCT-ND, TempCo="200 ppm/C", Tolerance_%=5%, Value2=0.1W, Value_Code=0000, ValueDisplayed=0, AEC Category=Q200, AEC Grade=0, AEC Qualified=Y, ComponentLink1Description="Datasheet link", ComponentLink1URL=http://www.vishay.com/docs/20035/dcrcwe3.pdf, CompType=Resistor, EIA_Code=E24, MountType=SMT, PackageReference=0603, PartNumber=CRCW06030000Z0EA, Res_ohm=0, RoHS=E, SizeArea_mm2=1.28, SizeX_mm=1.6, SizeY_mm=0.8, SizeZ_mm=1, Supplier 1=Digi-Key, Supplier 2=Newark, Supplier 3=Mouser, Supplier Part Number 2=52K8014, Supplier Part Number 3=71-CRCW0603-0-E3, Technology="Thick Film", Value1=5%, VDC_V=75V
R38 R39: library part CMP-0022746-5, "RES, 10.0 k, 1%, 0.1 W, 0603", Manufacturer=Yageo, Power_W=100mW, Supplier Part Number 1=311-10.0KHRCT-ND, TempCo="100 ppm/C", Tolerance_%=1%, Value2=0.1W, Value_Code=10k0, ValueDisplayed=10.0k, AEC Category=Q200, AEC Grade=N/A, AEC Qualified=N, ComponentLink1Description="Datasheet link", ComponentLink1URL=http://www.yageo.com/pdf/Pu-RC0603_51_PbFree_L_2.pdf, CompType=Resistor, EIA_Code=E96, MountType=SMT, PackageReference=0603, PartNumber=RC0603FR-0710KL, Res_ohm=10k, RoHS=Y, SizeArea_mm2=1.28, SizeAreaWB_mm2=4.68, SizeX_mm=1.6, SizeY_mm=0.8, SizeZ_mm=1, Supplier 1=Digi-Key, Supplier 2=Mouser, Supplier 3=Farnell, Supplier Part Number 2=603-RC0603FR-0710KL, Supplier Part Number 3=9238603, Technology="Thick Film", Value1=1%, VDC_V=75V
R57: library part CMP-0026918-5, "RES, 3.3 k, 5%, 0.063 W, AEC-Q200 Grade 0, 0402", Manufacturer=Vishay-Dale, Power_W=63mW, Supplier Part Number 1=541-3.3KJCT-ND, TempCo="200 ppm/C", Tolerance_%=5%, Value2=0.063W, Value_Code=3k30, ValueDisplayed=3.3k, AEC Category=Q200, AEC Grade=0, AEC Qualified=Y, ComponentLink1Description="Datasheet link", ComponentLink1URL=http://www.vishay.com/docs/20035/dcrcwe3.pdf, CompType=Resistor, EIA_Code=E24, MountType=SMT, PackageReference=0402, PartNumber=CRCW04023K30JNED, Res_ohm=3.3k, RoHS=E, SizeArea_mm2=0.5, SizeX_mm=1, SizeY_mm=0.5, SizeZ_mm=0.6, Supplier 1=Digi-Key, Supplier 2=Newark, Supplier 3=Mouser, Supplier Part Number 2=59M6723, Supplier Part Number 3=71-CRCW0402J-3.3K-E3, Technology="Thick Film", Value1=5%, VDC_V=50V
R58 R59 R60 R61 R72 R73 R74 R75 R76 R77: library part CMP-0026071-3, "RES, 1.00 k, 1%, 0.063 W, AEC-Q200 Grade 0, 0402", Manufacturer=Vishay-Dale, Power_W=63mW, Supplier Part Number 1=541-1.00KLCT-ND, TempCo="100 ppm/C", Tolerance_%=1%, Value2=0.063W, Value_Code=1k00, ValueDisplayed=1.00k, AEC Category=Q200, AEC Grade=0, AEC Qualified=Y, ComponentLink1Description="Datasheet link", ComponentLink1URL=http://www.vishay.com/docs/20035/dcrcwe3.pdf, CompType=Resistor, EIA_Code=E96, MountType=SMT, PackageReference=0402, PartNumber=CRCW04021K00FKED, Res_ohm=1k, RoHS=E, SizeArea_mm2=0.5, SizeX_mm=1, SizeY_mm=0.5, SizeZ_mm=0.6, Supplier 1=Digi-Key, Supplier 2=Newark, Supplier 3=Mouser, Supplier Part Number 2=52K6545, Supplier Part Number 3=71-CRCW0402-1.0K-E3, Technology="Thick Film", Value1=1%, VDC_V=50V
R62: library part CMP-0026824-3, "RES, 100, 5%, 0.063 W, AEC-Q200 Grade 0, 0402", Manufacturer=Vishay-Dale, Power_W=63mW, Supplier Part Number 1=541-100JCT-ND, TempCo="200 ppm/C", Tolerance_%=5%, Value2=0.063W, Value_Code=100R, ValueDisplayed=100, AEC Category=Q200, AEC Grade=0, AEC Qualified=Y, ComponentLink1Description="Datasheet link", ComponentLink1URL=http://www.vishay.com/docs/20035/dcrcwe3.pdf, CompType=Resistor, EIA_Code=E24, MountType=SMT, PackageReference=0402, PartNumber=CRCW0402100RJNED, Res_ohm=100, RoHS=E, SizeArea_mm2=0.5, SizeX_mm=1, SizeY_mm=0.5, SizeZ_mm=0.6, Supplier 1=Digi-Key, Supplier 2=Newark, Supplier 3=Mouser, Supplier Part Number 2=59M6700, Supplier Part Number 3=71-CRCW0402J-100-E3, Technology="Thick Film", Value1=5%, VDC_V=50V
R63 R64: library part CMP-0026736-1, "RES, 470, 1%, 0.063 W, 0402", Manufacturer="Yageo America", Power_W=63mW, Supplier Part Number 1=311-470LRCT-ND, TempCo="100 ppm/C", Tolerance_%=1%, Value2=0.063W, Value_Code=470R, ValueDisplayed=470, AEC Category=Q200, AEC Grade=N/A, AEC Qualified=N, ComponentLink1Description="Datasheet link", ComponentLink1URL=http://www.yageo.com/documents/recent/PYu-RC_Group_51_RoHS_L_04.pdf, CompType=Resistor, LatestRevisionDate=2017-03-09, MountType=SMT, PackageReference=0402, PartNumber=RC0402FR-07470RL, Published=2008-06-26, Publisher="Texas Instruments", Res_ohm=470, RoHS=Y, SizeArea_mm2=0.5, SizeX_mm=1, SizeY_mm=0.5, SizeZ_mm=0.6, Supplier 1=Digi-Key, Supplier 2=Newark, Supplier 3=Mouser, Supplier Part Number 2=67R9940, Supplier Part Number 3=603-RC0402FR-07470RL, Technology="Thick Film", U/M=EA, Value1=1%, VDC_V=50V
R65 R67: library part CMP-0026825-5, "RES, 10 k, 5%, 0.063 W, AEC-Q200 Grade 0, 0402", Manufacturer=Vishay-Dale, Power_W=63mW, Supplier Part Number 1=541-10KJCT-ND, TempCo="200 ppm/C", Tolerance_%=5%, Value2=0.063W, Value_Code=10k0, ValueDisplayed=10k, AEC Category=Q200, AEC Grade=0, AEC Qualified=Y, ComponentLink1Description="Datasheet link", ComponentLink1URL=http://www.vishay.com/docs/20035/dcrcwe3.pdf, CompType=Resistor, EIA_Code=E24, MountType=SMT, PackageReference=0402, PartNumber=CRCW040210K0JNED, Res_ohm=10k, RoHS=E, SizeArea_mm2=0.5, SizeX_mm=1, SizeY_mm=0.5, SizeZ_mm=0.6, Supplier 1=Digi-Key, Supplier 2=Newark, Supplier 3=Mouser, Supplier Part Number 2=59M6696, Supplier Part Number 3=71-CRCW0402J-10K-E3, Technology="Thick Film", Value1=5%, VDC_V=50V
R68: library part CMP-0026413-2, "RES, 4.87 k, 1%, 0.063 W, AEC-Q200 Grade 0, 0402", Manufacturer=Vishay-Dale, Power_W=63mW, Supplier Part Number 1=541-4.87KLCT-ND, TempCo="100 ppm/C", Tolerance_%=1%, Value2=0.063W, Value_Code=4k87, ValueDisplayed=4.87k, AEC Category=Q200, AEC Grade=0, AEC Qualified=Y, ComponentLink1Description="Datasheet link", ComponentLink1URL=http://www.vishay.com/docs/20035/dcrcwe3.pdf, CompType=Resistor, EIA_Code=E96, MountType=SMT, PackageReference=0402, PartNumber=CRCW04024K87FKED, Res_ohm=4.87k, RoHS=E, SizeArea_mm2=0.5, SizeX_mm=1, SizeY_mm=0.5, SizeZ_mm=0.6, Supplier 1=Digi-Key, Supplier 2=Newark, Supplier 3=Mouser, Supplier Part Number 2=52K7047, Supplier Part Number 3=71-CRCW0402-4.87K-E3, Technology="Thick Film", Value1=1%, VDC_V=50V
R70: library part CMP-0026946-3, "RES, 51, 5%, 0.063 W, AEC-Q200 Grade 0, 0402", Manufacturer=Vishay-Dale, Power_W=63mW, Supplier Part Number 1=541-51JCT-ND, TempCo="200 ppm/C", Tolerance_%=5%, Value2=0.063W, Value_Code=51R0, ValueDisplayed=51, AEC Category=Q200, AEC Grade=0, AEC Qualified=Y, ComponentLink1Description="Datasheet link", ComponentLink1URL=http://www.vishay.com/docs/20035/dcrcwe3.pdf, CompType=Resistor, EIA_Code=E24, MountType=SMT, PackageReference=0402, PartNumber=CRCW040251R0JNED, Res_ohm=51, RoHS=E, SizeArea_mm2=0.5, SizeX_mm=1, SizeY_mm=0.5, SizeZ_mm=0.6, Supplier 1=Digi-Key, Supplier 2=Newark, Supplier 3=Mouser, Supplier Part Number 2=72M6804, Supplier Part Number 3=71-CRCW0402J-51-E3, Technology="Thick Film", Value1=5%, VDC_V=50V
R79: library part CMP-0022769-3, "RES, 120, 1%, 0.1 W, 0603", Manufacturer="Yageo America", Power_W=100mW, Supplier Part Number 1=311-120HRCT-ND, TempCo="200 ppm/C", Tolerance_%=1%, Value2=0.1W, Value_Code=120R, ValueDisplayed=120, AEC Category=Q200, AEC Qualified=?, ComponentLink1Description="Datasheet link", ComponentLink1URL=http://www.yageo.com/pdf/Pu-RC0603_51_PbFree_L_2.pdf, CompType=Resistor, LatestRevisionDate=2017-03-09, MountType=SMT, PackageReference=0603, PartNumber=RC0603FR-07120RL, Published=2008-06-26, Publisher="Texas Instruments", Res_ohm=120, RoHS=Y, SizeArea_mm2=1.28, SizeX_mm=1.6, SizeY_mm=0.8, SizeZ_mm=1, Supplier 1=Digi-Key, Supplier 2=Mouser, Supplier 3=Farnell, Supplier Part Number 2=603-RC0603FR-07120RL, Supplier Part Number 3=9238379, Technology="Thick Film", U/M=EA, Value1=1%, VDC_V=150V
R88 R89: library part CMP-0025932-5, "RES, 5.1 k, 5%, 0.1 W, 0603", Manufacturer=Yageo, Power_W=100mW, Supplier Part Number 1=311-5.1KGRCT-ND, TempCo="100 ppm/C", Tolerance_%=5%, Value2=0.1W, Value_Code=5k10, ValueDisplayed=5.1k, AEC Category=Q200, AEC Grade=N/A, AEC Qualified=N, ComponentLink1Description="Datasheet link", ComponentLink1URL=http://www.yageo.com/pdf/Pu-RC0603_51_PbFree_L_2.pdf, CompType=Resistor, EIA_Code=E24, MountType=SMT, PackageReference=0603, PartNumber=RC0603JR-075K1L, Res_ohm=5.1k, RoHS=Y, SizeArea_mm2=1.28, SizeAreaWB_mm2=4.68, SizeX_mm=1.6, SizeY_mm=0.8, SizeZ_mm=1, Supplier 1=Digi-Key, Supplier 2=Mouser, Supplier 3=Farnell, Supplier Part Number 2=603-RC0603JR-075K1L, Supplier Part Number 3=1799436, Technology="Thick Film", Value1=5%, VDC_V=75V
R100: library part CMP-0026100-2, "RES, 1.00 M, 1%, 0.063 W, AEC-Q200 Grade 0, 0402", Manufacturer=Vishay-Dale, Power_W=63mW, Supplier Part Number 1=541-1.00MLCT-ND, TempCo="100 ppm/C", Tolerance_%=1%, Value2=0.063W, Value_Code=1M00, ValueDisplayed=1.00M, AEC Category=Q200, AEC Grade=0, AEC Qualified=Y, ComponentLink1Description="Datasheet link", ComponentLink1URL=http://www.vishay.com/docs/20035/dcrcwe3.pdf, CompType=Resistor, EIA_Code=E96, MountType=SMT, PackageReference=0402, PartNumber=CRCW04021M00FKED, Res_ohm=1M, RoHS=E, SizeArea_mm2=0.5, SizeX_mm=1, SizeY_mm=0.5, SizeZ_mm=0.6, Supplier 1=Digi-Key, Supplier 2=Newark, Supplier 3=Mouser, Supplier Part Number 2=52K6593, Supplier Part Number 3=71-CRCW0402-1.0M-E3, Technology="Thick Film", Value1=1%, VDC_V=50V
R101: library part CMP-0026441-2, "RES, 52.3 k, 1%, 0.063 W, AEC-Q200 Grade 0, 0402", Manufacturer=Vishay-Dale, Power_W=63mW, Supplier Part Number 1=541-52.3KLCT-ND, TempCo="100 ppm/C", Tolerance_%=1%, Value2=0.063W, Value_Code=52k3, ValueDisplayed=52.3k, AEC Category=Q200, AEC Grade=0, AEC Qualified=Y, ComponentLink1Description="Datasheet link", ComponentLink1URL=http://www.vishay.com/docs/20035/dcrcwe3.pdf, CompType=Resistor, EIA_Code=E96, MountType=SMT, PackageReference=0402, PartNumber=CRCW040252K3FKED, Res_ohm=52.3k, RoHS=E, SizeArea_mm2=0.5, SizeX_mm=1, SizeY_mm=0.5, SizeZ_mm=0.6, Supplier 1=Digi-Key, Supplier 2=Newark, Supplier 3=Mouser, Supplier Part Number 2=52K7137, Supplier Part Number 3=71-CRCW0402-52.3K-E3, Technology="Thick Film", Value1=1%, VDC_V=50V
R102: library part CMP-0078244-2, "RES, 30.0 k, 1%, 0.063 W, AEC-Q200 Grade 0, 0402", Manufacturer=Vishay-Dale, Power_W=63mW, Supplier Part Number 1=541-30.0KLCT-ND, TempCo="100 ppm/C", Tolerance_%=1%, Value2=0.063W, Value_Code=30k0, ValueDisplayed=30.0k, AEC Category=Q200, AEC Grade=0, AEC Qualified=Y, ComponentLink1Description="Datasheet link", ComponentLink1URL=http://www.vishay.com/docs/20035/dcrcwe3.pdf, CompType=Resistor, Green_EU RoHS="Passed with Exemption", Green_EU RoHS-2=Passed, Green_Lifecycle=Active, Green_REACh=Passed, MountType=SMT, PackageReference=0402, PartNumber=CRCW040230K0FKED, Res_ohm=30k, RoHS=E, SizeArea_mm2=0.5, SizeX_mm=1, SizeY_mm=0.5, SizeZ_mm=0.6, Supplier 1=Digi-Key, Supplier 2=Newark, Supplier 3=Mouser, Supplier Part Number 2=52K6953, Supplier Part Number 3=71-CRCW0402-30K-E3, Technology="Thick Film", Value1=1%, VDC_V=50V
S1: library part CMP-0002328-1, "Switch, SPST, 0.05 A, 12 VDC, SMD", CurrentRating_mA=50A, Manufacturer=Diptronics, Circuit=SPST, ComponentLink1Description="Datasheet URL", ComponentLink1URL=http://www.dip.com.tw/en/en-product-information/en-switch004/item/download/1976_b080c057386714e3a6604cbe658b9df3, CompType=Switch, LatestRevisionDate=2017-03-09, MountType=SMT, Orientation="Side Actuated", PackageReference=7.8x3.5mm, PartNumber=1188E-1K2-V-TR, PositionCount=1, Publisher="Texas Instruments", RoHS=Y, SizeArea_mm2=27.3, SizeAreaWB_mm2=53.9, SizeX_mm=7.8, SizeY_mm=3.5, SizeZ_mm=3.5, VDC_V=12V
S2 S3 S5: library part CMP-0002233-1, "Switch, Dual SPDT,  2 Pos, 0.1A, 6VDC, SMD", CurrentRating_mA=100A, Manufacturer="Copal Electronics", Supplier Part Number 1=CASD20JCT-ND, Circuit=SPDT, ComponentLink1Description="Datasheet Link", ComponentLink1URL=http://www.nidec-copal-electronics.com/e/catalog/switch/cas.pdf, CompType=Switch, LatestRevisionDate=2017-03-09, MountType=SMT, Orientation="Top Actuated", PackageReference=5.4x3.9mm, PartNumber=CAS-D20TA, PositionCount=2, Publisher="Texas Instruments", RoHS=Y, Supplier 1=Digi-Key, SwitchFunction=On-On, VDC_V=6V
S4: library part CMP-0002123-2, "SLIDE SWITCH DPDT  .1A, SMT", CurrentRating_mA=100A, Manufacturer="Copal Electronics", Supplier Part Number 1=CAS220JCT-ND, Circuit=DPDT, ComponentLink1Description="Datasheet URL", ComponentLink1URL=http://copal-electronics.info/en/0008e/02462.pdf, CompType=Switch, LatestRevisionDate=2017-03-09, MountType=SMT, Orientation=Horizontal, PackageReference="SWITCH, 5.4x2.5x3.9mm", PartNumber=CAS-220TA, PositionCount=2, Publisher="Texas Instruments", RoHS=Y, Supplier 1=Digi-Key, SwitchFunction=On-On, VDC_V=6V
TP1 TP2 TP3 TP4 TP5 TP6 TP7 TP8: library part CMP-0078143-3, "TEST POINT.  No entry in BOM.", Manufacturer=N/A, CompType=Testpoint, PackageReference=N/A, PartNumber=N/A
U1: library part CMP-0091701-2, "Real-Time Microcontroller 32bit, 120MHz, 384KBytes Flash, 69KBytes RAM, PQFP100", Frequency_Fixed=120MHz, Manufacturer="Texas Instruments", Operating Temperature Range="-40°C to +125°C", AEC Category=Q200, AEC Qualified=No, ComponentLink1Description="Datasheet Link", ComponentLink1URL=http://www.ti.com/lit/ds/symlink/GPN.pdf, ComponentLink2Description="Product Folder", ComponentLink2URL=http://www.ti.com/product/GPN, ComponentLink3Description="Online Datasheet", ComponentLink3URL=http://www.ti.com/product/GPN/datasheet, CompType=IC, Core Architecture=TMS320C28x, Data Bus Width=32bits, Datasheet Path=datasheets/IC-F280039CPZS.pdf, helpURL=https://upverter.com/upn/revision/79ab1500d65182d7/, Interface=I2C,SPI,UART,CAN,LIN,SCI,Other, Memory Size=384KBytes, Memory Type=FLASH, Number Of A/D Converters=3, Number Of Adc Channels=23, Number Of Cores=1, Number Of I2C Channels=2, Number Of I/Os=55, Number Of Pwm Channels=16, Number Of Spi Channels=2, Number Of Timers/Counters=3, Number Of Uart Channels=4, PackageReference=PQFP100, Part Number=F280039CPZS, PartNumber=F280039CPZS, Ram Size=69KBytes, RoHS=UNKNOWN, SizeZ_mm=1.6mm, Standoff Height=0.05mm, TJmax_C=+125°C
U2: library part CMP-0077953-1, "MSP432E401YTPDT, PDT0128A (TQFP-128)", Alternate Manufacturer="Texas Instruments", Alternate PartNumber=MSP432E401YTPDTR, AEC Category=Q200, AEC Qualified=N, ComponentLink1Description="Datasheet Link", ComponentLink1URL=http://www.ti.com/lit/ds/symlink/tm4c129encpdt.pdf, ComponentLink2Description="Product Folder", ComponentLink2URL=TBD, CompType=IC, Manufacturer="Texas Instruments", MountType=SMT, PackageDescription=TQFP-128, PackageReference=PDT0128A, PartNumber=MSP432E401YTPDT, SizeArea_mm2=256, SizeAreaWB_mm2=324, SizeX_mm=16, SizeY_mm=16, SizeZ_mm=1.2
U3: library part CMP-0091303-1, "Full/Low Speed Isolated USB Repeater, SOIC16-Wide", Alternate Manufacturer="Analog Devices", Alternate PartNumber=ADuM3160BRWZ, Manufacturer="Texas Instruments", Max Supply Voltage=5.5V, Min Supply Voltage=3V, Nominal Supply Current=9-9.5mA, Operating Temperature Range="-55°C to +150°C", AEC Qualified=No, Data Rate=12Mbits/s, Datasheet Path=datasheets/IC-ISOUSB111DW.pdf, helpURL=https://upverter.com/upn/revision/bd93d5af0e7edffb/, Interface=USB, Number Of Ports=1, PackageReference=SOICW16, Part Number=ISOUSB111DW, PartNumber=ISOUSB111DW, RoHS=UNKNOWN, SizeZ_mm=2.65mm, Standoff Height=0.1mm, TaMax_C=+125°C, TaMin_C=-40°C, TJmax_C=+150°C, Usb Standard="USB 2.0"
U4 U5: library part CMP-0043115-3, "4-Channel ESD Protection Array for High-Speed Data Interfaces, DRY0006A (USON-6)", Breakdown Voltage(Min)(V)=6, IO Capacitance(Typ)(pF)=1.6, IO Leakage Current(nA)=1, Manufacturer="Texas Instruments", Operating Temperature Range="-40 to 85 C", Rating=Catalog, 1394 / Firewire=TRUE, AEC Category=Q200, AEC Qualified=N, ComponentLink1Description="Datasheet Link", ComponentLink1URL=http://www.ti.com/lit/ds/symlink/tpd4e004.pdf, ComponentLink2Description="Product Folder", ComponentLink2URL=http://www.ti.com/product/tpd4e004, ComponentLink3Description="Online Datasheet", ComponentLink3URL=http://www.ti.com/product/tpd4e004/datasheet, CompType=IC, Eco-Plan="Green (RoHS & no Sb/Br)", IEC 61000-4-2 Air-Gap(+/- kV)=12, IEC 61000-4-2 Contact(+/- kV)=8, MountType=SMT, PackageDescription=USON-6, PackageReference=DRY0006A, PartNumber=TPD4E004DRYR, RoHS=Y, Serial ATA / eSATA=TRUE, SizeArea_mm2=1.45, SizeAreaWB_mm2=4.9, SizeX_mm=1.0, SizeY_mm=1.45, SizeZ_mm=0.6, USB High Speed=TRUE
U6 U8 U9: library part CMP-0067418-1, "DUAL 10-Ohm SPDT ANALOG SWITCH, DGS0010A (VSSOP-10)", Alternate Manufacturer="Texas Instruments", Alternate PartNumber=TS5A23157DGST, ComponentLink1Description="Datasheet Link", ComponentLink1URL=http://www.ti.com/lit/ds/symlink/ts5a23157.pdf, CompType=IC, Footprint Path 6=C:\AltiumLibraries\Footprints\TI\.PcbLib, Green_EU RoHS=Passed, Green_EU RoHS-2=Passed, Green_Lifecycle=Active, Green_REACh=Passed, LatestRevisionDate=2017-06-09, Manufacturer="Texas Instruments", MountType=SMT, PackageDescription=VSSOP-10, PackageReference=DGS0010A, PartNumber=TS5A23157DGSR, Publisher="Texas Instruments", RoHS=Y, SizeArea_mm2=14.7, SizeAreaWB_mm2=23.6, SizeX_mm=4.9, SizeY_mm=3.0, SizeZ_mm=1.1, U/M=EA